# Altium PCB DC DC buck converter.PcbDoc
Units mm, origin at the board's own origin, x right, y up, seen from the top; angles counter-clockwise.
Board outline 55 x 30 mm, 2 copper layers (Top Layer, Bottom Layer), stack 1.58 mm thick; 10 components, 6 nets, 37 pads, 0 vias.
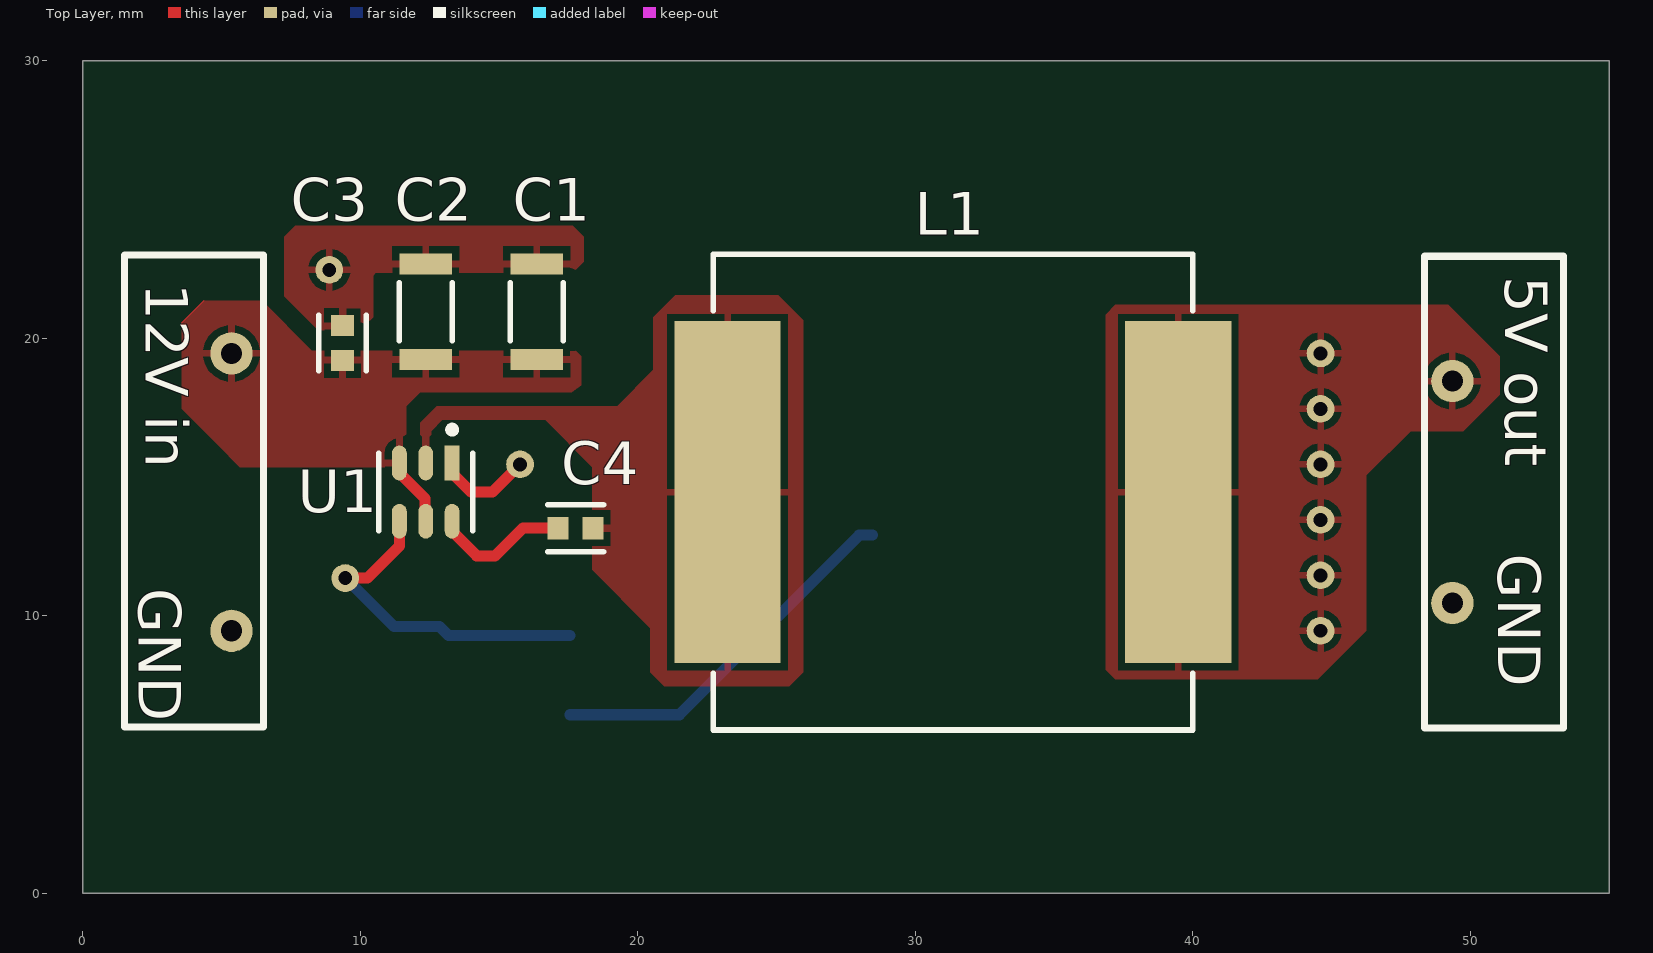
[diagram p0: Top Layer view]
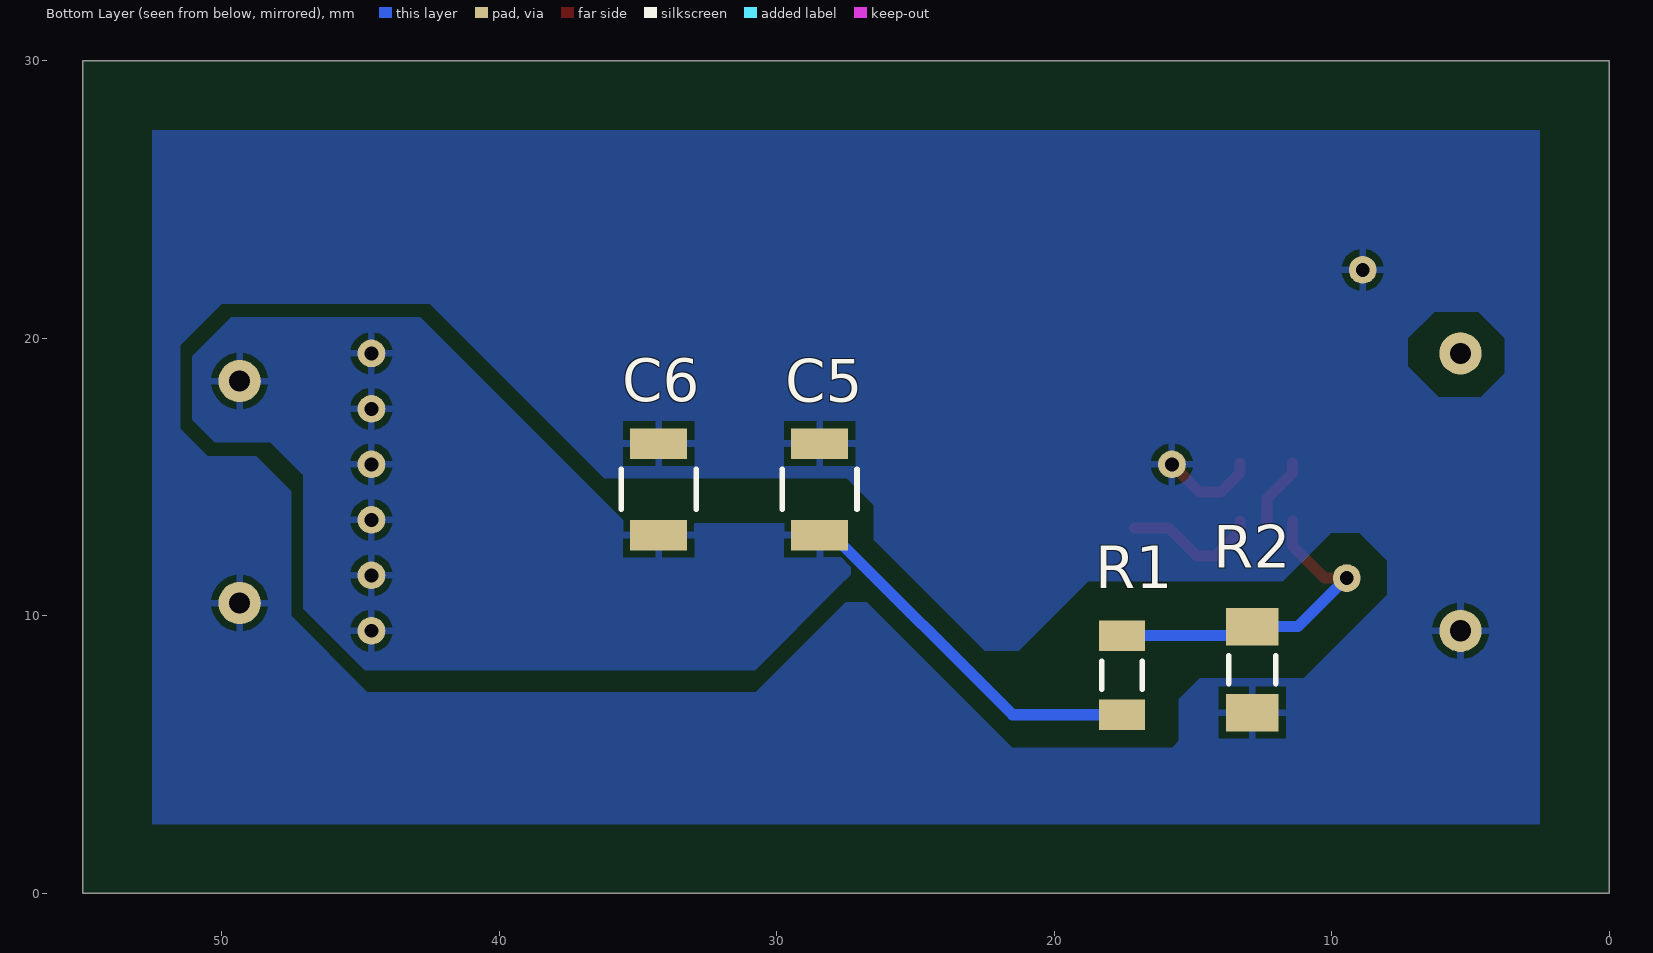
[diagram p1: Bottom Layer view, seen from below]
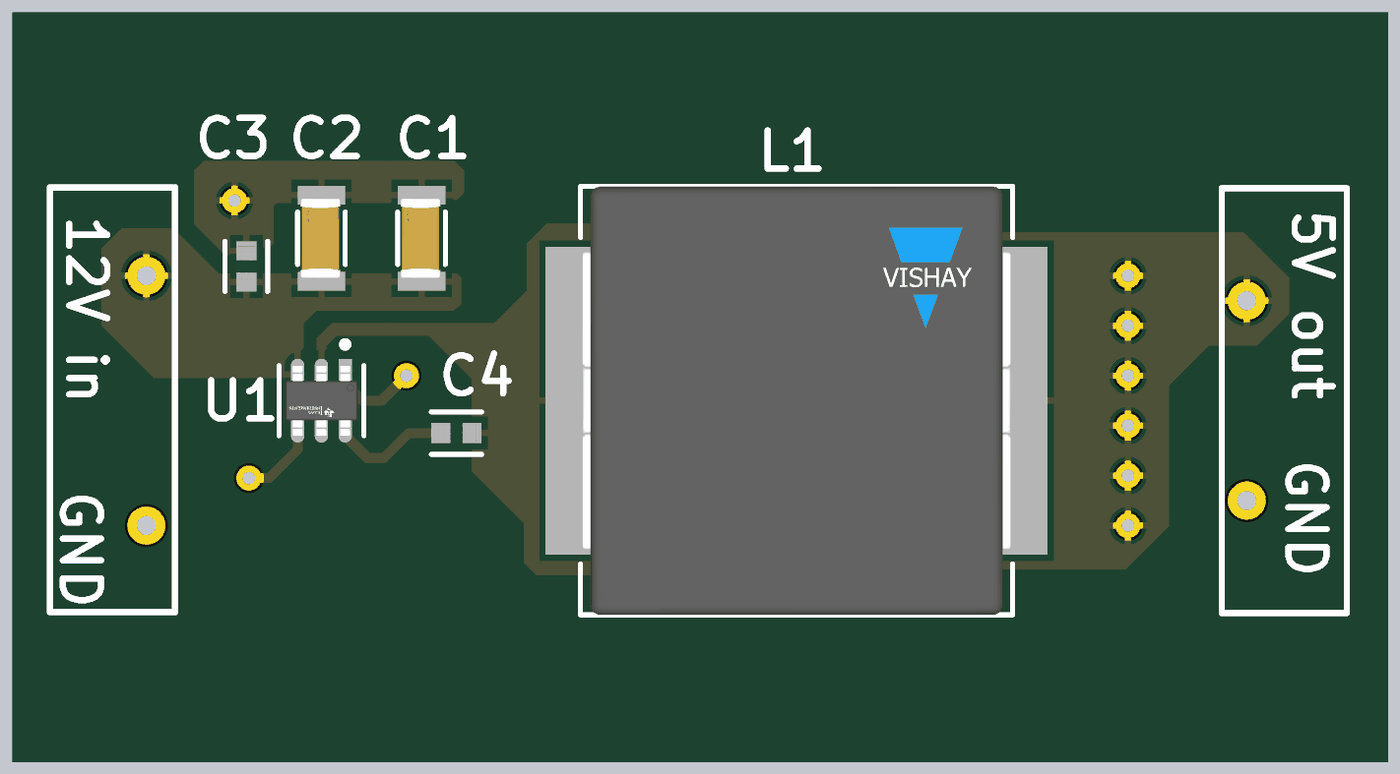
[diagram p2: 3D render of the assembled board from above, using the file's embedded part models]

## Layer stack, top to bottom
Top Solder: solder mask 0.0102, Solder Resist, Dk 3.5
Top Layer: signal copper 0.04
Dielectric 1: dielectric 1.5, FR-4, Dk 4.8
Bottom Layer: signal copper 0.04
Bottom Solder: solder mask 0.0102, Solder Resist, Dk 3.5

## Board outline
0,0 55,0 55,30 0,30

## Design rules (kind name [scope] priority, off if disabled: settings)
Clearance [All] p1: gap=0.15 ignorepadtopadclearanceinfootprint=FALSE
PolygonConnect [All] p1: connectstyle=Relief reliefconductorwidth=0.254 reliefentries=4 polygonreliefangle="90 Angle" airgapwidth=0.254
RoutingVias [All] p1: holewidth=0.6 width=1 viastyle="Through Hole" minholewidth=0.4 minwidth=0.8 maxholewidth=5 maxwidth=6
SolderMaskExpansion [All] p1: expansion=0.102 istentingtop=FALSE
SupplyNets "Schematic Supply Nets_3" [InNet('12V')] p1: voltage=0.000
SupplyNets "Schematic Supply Nets_2" [InNet('5V')] p2: voltage=0.000
SupplyNets "Schematic Supply Nets" [InNet('GND')] p3: voltage=0.000
Width [All] p1: maxlimit=2 minlimit=0.2 preferedwidth=0.4
30 further rules are at their usual default settings.

## Classes and differential pairs
component class "Ковальчук КП": C1 C2 C3 C5 C6 L1 R1 R2 U1

## Components (designator, comment, footprint, x,y, rotation, side; value= is the part's Value field where it differs from the comment)
C1 "10uF" FP-CGA5L-0_3-0_1-IPC_B 16.353,20.963 r90 top
C2 "10uF" FP-CGA5L-0_3-0_1-IPC_B 12.353,20.963 r90 top
C3 "100nF" FP-CL10-IPC_C 9.353,19.836 r90 top
C4 "100nF" FP-CL10-IPC_C 17.753,13.163 r180 top
C5 "22uF" FP-GRM32E-0_3-0_2-MFG 28.453,14.563 r90 bottom
C6 "22uF" FP-GRM32E-0_3-0_2-MFG 34.253,14.563 r90 bottom
L1 "IHLP6767DZER4R7M01" FP-IHLP-6767DZ-FP_3_825x1-MFG 31.353,14.463 r0 top
R1 "ERJ-8ENF5492V" RESC3216X70X50NL05T20 17.553,7.863 r270 bottom
R2 "10K 5% 1206(3216)" RESC1206(3216)_M 12.853,8.063 r90 bottom value="10000.00 Ohm"
U1 "TPS562201DDCR" FP-DDC0006A-IPC_C 12.353,14.463 r270 top

## Footprints (in the part's own frame and the unit in brackets; to place one, negate y for a bottom-side part, rotate by r counter-clockwise, add the part's x,y. Pads: shape width x height; smd on the part's side, far side on the other; paste and mask are expansions set on the pad)
FP-CGA5L-0_3-0_1-IPC_B [mm]
  rect 0.756x1.906 smd paste+0 mask+0: 1(-1.725,0) 2(1.725,0)
  silkscreen extent -1.05,-0.95 1.05,0.95, body extent -2.35,-1.2 2.35,1.2, height 0.25
FP-CL10-IPC_C [mm]
  rect 0.758x0.812 smd paste+0 mask+0: 1(-0.627,0) 2(0.627,0)
  silkscreen extent -1.01,-0.85 1.01,0.85, body extent -1.11,-0.55 1.11,0.55, height 0.25
FP-DDC0006A-IPC_C [mm]
  rect 1.254x0.532 smd paste+0 mask+0: 1(-1.05,0.95)
  rrect100% 1.254x0.532 smd paste+0 mask+0: 2(-1.05,0) 3(-1.05,-0.95) 4(1.05,-0.95) 5(1.05,0) 6(1.05,0.95)
  silkscreen extent -2.37,-1.7 1.4,1.7, body extent -1.78,-1.55 1.78,1.55, height 0.25
FP-GRM32E-0_3-0_2-MFG [mm]
  rect 1.1x2.05 smd paste+0 mask+0: 1(-1.65,0) 2(1.65,0)
  silkscreen extent -0.72,-1.35 0.72,1.35, body extent -1.6,-1.25 1.6,1.25, height 2.7
FP-IHLP-6767DZ-FP_3_825x1-MFG [mm] "SMT Flat Wire High Current Inductor, body 12.8x12.8mm"
  rect 3.825x12.32 smd paste+0 mask+0: 1(-8.123,0) 2(8.123,0)
  silkscreen extent -8.64,-8.57 8.64,8.57, body extent -10.13,-8.67 10.13,8.67, height 0.25
RESC1206(3216)_M [mm] "Chip Resistor, Body 3.2x1.6mm, IPC Low Density"
  rect 1.35x1.9 smd: 1(-1.55,0) 2(1.55,0)
  silkscreen extent -0.5,-0.85 0.5,0.85, body extent -1.67,-0.87 1.67,0.87, height 0.75
RESC3216X70X50NL05T20 [mm] "Chip Resistor, 2-Leads, Body 3.20x1.60mm, IPC Medium Density"
  rect 1.1x1.65 smd: 1(-1.425,0) 2(1.425,0)
  silkscreen extent -0.5,-0.72 0.5,0.72, body extent -1.63,-0.82 1.62,0.82, height 0.7

## Part data
C1 C2: library part CMP-08246-000748-1, "Cap Ceramic 10uF 25V X7R 10% Pad SMD 1206 +125°C Automotive T/R", Case Code (Imperial)=1206, Case Code (Metric)=3216, Dielectric=X7R, Max Operating Temperature=125°C, Min Operating Temperature=-55°C, Package Quantity=2000, Ratings=AEC-Q200, Tolerance=10%, Voltage Rating=25V, Capacitance=10uF, Case/Package=1206, Composition=Ceramic, Depth=1.6mm, Height=1.6mm, Length=3.2mm, Mount="Surface Mount", Packaging="Tape and Reel", Termination=SMD/SMT, Thickness=0.071inch, Voltage Rating (DC)=25V, Weight=0.000571oz, Width=1.6mm
C3 C4: library part CMP-13271-001423-1, "Cap Ceramic 100nF 25V X7R ±10% Pad SMD 0603 +125°C T/R", Case Code (Imperial)=0603, Case Code (Metric)=1608, Dielectric=X7R, Max Operating Temperature=125°C, Min Operating Temperature=-55°C, Tolerance=10%, Voltage Rating=25V, Capacitance=100nF, Case/Package=0603, Depth=0.8mm, Height=0.8mm, Length=1.6mm, Mount="Surface Mount", Packaging="Tape and Reel", Radiation Hardening=No, Thickness=0.035inch, Width=0.031inch
C5 C6: library part CMP-06035-039823-1, "Chip Multilayer Ceramic Capacitors for General Purpose, 1210, 22uF, X7R, 15%, 20%, 25V", Case Code (Imperial)=1210, Case Code (Metric)=3225, Dielectric=X7R, Max Operating Temperature=125°C, Min Operating Temperature=-55°C, Package Quantity=1000, Resistor Type=Ceramic, Tolerance=20%, Voltage=25V, Capacitance=22uF, Case/Package=1210, Depth=2.5mm, Height=2.5mm, Lead Free="Lead Free", Length=3.2mm, Material=Ceramic, Mount="Surface Mount", Packaging="Tape and Reel", Radiation Hardening=No, REACH SVHC="No SVHC", Termination=SMD/SMT, Thickness=0.106inch, Voltage Rating=25V, Voltage Rating (DC)=25V, Weight=0.00388oz, Width=2.5mm
L1: library part CMP-02424-000190-1, "Commercial Inductors, High Saturation Series 4.7uH 16A 11.2mΩ 20%", Case/Package=6767, Current Rating=16A, DC Resistance (DCR)=11.2mR, Inductance=4.7uH, Inductance Tolerance=20%, Max DC Current=27A, Max Operating Temperature=125°C, Min Operating Temperature=-55°C, Package Quantity=250, Self Resonant Frequency=2MHz, Test Frequency=100kHz, Depth=17.15mm, Height=4mm, Height - Seated (Max)=0.158inch, Lead Free="Lead Free", Length=17.15mm, Military Standard=Not, Mount="Surface Mount", Number of Pins=2, Packaging="Tape and Reel", Radiation Hardening=No, RMS Current (Irms)=16A, Saturation Current=27A, Shielding=Shielded, Termination=SMD/SMT, Tolerance=20%, Width=0.675inch
R1: library part CMP-2003-00422-1, Manufacturer=Panasonic, Part Number=ERJ-8ENF5492V
R2: library part CMP-1014-00098-1, "10K 0.25W 5% 1206 (3216 Metric)  SMD", Case-EIA=1206, Case-Metric=3216, Power="0.25 W", Tolerance="5 %", Technology=SMT
U1: library part CMP-04918-000361-1, "IC REG BUCK ADJ 2A TSOT23-6", Case/Package=SOT, Max Input Voltage=17V, Max Operating Temperature=125°C, Max Output Current=2A, Min Input Voltage=4.5V, Min Operating Temperature=-40°C, Output Voltage=7V, Quiescent Current=400uA, Switching Frequency=580kHz, Contact Plating=Tin, Lead Free="Lead Free", Mount="Surface Mount", Number of Outputs=1, Number of Pins=6, Operating Supply Voltage=17V, Output Type=Adjustable, RoHS Compliant=Yes

## Free pads (board coordinates)
  round 1.524 hole 0.762: 4(49.353,10.463) 4(49.353,18.463) 5(5.353,19.463) 6(5.353,9.463)
  round 1 hole 0.5: 6(8.877,22.473) 6(9.453,11.363) 6(15.753,15.463) 6(44.603,9.463) 6(44.603,11.463) 6(44.603,13.463) 6(44.603,15.463) 6(44.603,17.463) 6(44.603,19.463)

## Nets (pads, with @x,y where several pads share a name; then routed paths per layer and width w, separated by ;. In a path a pad name is that pad's centre, name@x,y a point inside that pad or via, vN(x,y) a via of type N, cw(c..) or ccw(c..) an arc to the next point about the centre after c; other vN are vias at no path point)
5V: C5.1 C6.1 L1.2 pad.4@49.353,18.463 pad.6@44.603,9.463 pad.6@44.603,11.463 pad.6@44.603,13.463 pad.6@44.603,15.463 pad.6@44.603,17.463 pad.6@44.603,19.463 R1.2 | length 13.6
  Bottom Layer w0.4: R1.2 21.503,6.438 27.978,12.913 C5.1
12V: C1.1 C2.1 C3.1 pad.5 U1.3 U1.5 | length 2.5
  Top Layer w0.4: U1.3 11.403,15.152 12.328,14.227 12.328,13.438 U1.5
GND: C1.2 C2.2 C3.2 C5.2 C6.2 pad.4@49.353,10.463 pad.6@5.353,9.463 pad.6@8.877,22.473 pad.6@15.753,15.463 R2.1 U1.1 | length 3.6
  Top Layer w0.4: U1.1 13.303,15.152 13.993,14.463 14.753,14.463 15.753,15.463 pad.6@15.703,15.513
NetC4_2: C4.2 U1.6 | length 5
  Top Layer w0.4: U1.6 13.303,13.052 14.192,12.163 14.853,12.163 15.853,13.163 C4.2
NetR1_1: pad.6@9.453,11.363 R1.1 R2.2 U1.4 | length 12.3
  Top Layer w0.4: pad.6@9.453,11.363 10.253,11.363 11.403,12.513 U1.4
  Bottom Layer w0.4: pad.6@9.453,11.363 11.203,9.613 R2.2 13.178,9.288 R1.1
"SW OUT": C4.1 L1.1 U1.2

## Polygon pours and split planes (outlines as drawn)
no net on Top Layer "NONET_L01_P007" (solid, pour order 7): 4.353,21.363 3.553,20.563
12V on Top Layer "12V_L01_P008" (solid, pour order 8): 4.853,16.163 3.553,17.463 3.553,20.563 4.353,21.363 6.453,21.363 8.253,19.563 17.753,19.563 17.953,19.363 17.953,18.313 17.62,18.063 12.153,18.063 11.653,17.563 11.653,15.363 5.653,15.363
"SW OUT" on Top Layer "SW_OUT_L01_P012" (solid, pour order 12): 20.453,7.963 20.953,7.463 25.453,7.463 25.953,7.963 25.953,20.663 25.053,21.563 21.353,21.563 20.553,20.763 20.553,18.863 19.253,17.563 12.753,17.563 12.153,16.963 12.153,15.513 12.553,15.513 12.553,16.663 12.953,17.063 16.653,17.063 18.353,15.363 18.353,11.663 20.453,9.563
5V on Top Layer "5V_L01_P013" (solid, pour order 13): 51.053,17.963 49.753,16.663 47.853,16.663 46.253,15.063 46.253,9.463 44.503,7.713 37.203,7.713 36.853,8.063 36.853,20.863 37.203,21.213 49.203,21.213 51.053,19.363
GND on Top Layer "GND_L01_P016" (solid, pour order 16): 17.653,22.363 18.053,22.763 18.053,23.663 17.653,24.063 7.653,24.063 7.253,23.663 7.253,21.513 8.503,20.263 9.953,20.263 10.453,20.763 10.453,22.263 10.553,22.363
GND on Bottom Layer "GND_L02_P027" (solid, pour order 27): 8.5,13 11.366,13 11.403,12.963 11.5,13.059 11.5,14.25 8.5,14.25
GND on Bottom Layer "GND_L02_P026" (solid, pour order 26): 8,9.75 8,13 7,13 7,9.75
GND on Bottom Layer "GND_L02_P021" (solid, pour order 21): 9.5,13.5 11.75,11.25 18.766,11.25 21.266,8.75 22.5,8.75 26.5,12.75 26.5,13.984 27.479,14.963 36.213,14.963 42.5,21.25 52.5,21.25 52.5,27.5 2.5,27.5 2.5,21.75 3.287,20.963 6.287,20.963 7.25,20 7.25,19 5.25,17 2.5,17 2.5,13.5
GND on Bottom Layer "GND_L02_P025" (solid, pour order 25): 6.875,17.875 4.625,17.875 3.75,18.75 3.75,20 4.713,20.963 6.853,20.963 6.853,21.647 6.5,22 3,22 2.5,22.5 2.5,17 7,17 7.75,17.75
GND on Bottom Layer "GND_L02_P023" (solid, pour order 23): 6.5,11 7,11 10,14 3.875,13.5
GND on Bottom Layer "GND_L02_P020" (solid, pour order 20): 52.5,21.5 49.75,21.5 51.5,19.75 51.5,16.75 50.5,15.75 48.75,15.75 47.5,14.5 47.5,10 44.75,7.25 30.75,7.25 27.5,10.5 26.75,10.5 21.5,5.25 15.75,5.25 15.5,5.5 15.5,7 14.75,7.75 11,7.75 5.25,13.5 2.5,13.5 2.5,2.5 52.5,2.5
5V on Bottom Layer "5V_L02_P014" (solid, pour order 14): 27.328,13.338 27.328,11.488 27.753,11.063 30.767,8.049 44.839,8.049 47.053,10.263 47.053,15.063 48.253,16.263 50.253,16.263 51.053,17.063 51.053,19.363 49.653,20.763 42.853,20.763 35.428,13.338

## Silkscreen, mask and mechanical layers (free items; w line width, h text height)
Top Overlay:
  lines w0.254: 1.5,6 6.5,6 6.5,23 1.5,23 1.5,6 ; 48.353,5.963 53.353,5.963 53.353,22.963 48.353,22.963 48.353,5.963
  text "5V out" at 51.254,22.246 h1.52 r270
  text "12V in" at 2.254,21.996 h1.52 r270
  text "GND" at 51.004,12.246 h1.52 r270
  text "GND" at 2.004,10.996 h1.52 r270